# Altium PCB POL.PcbDoc
Units mm, origin at the board's own origin, x right, y up, seen from the top; angles counter-clockwise.
Board outline 54.86 x 9.4 mm, 2 copper layers (Top Layer, Bottom Layer), stack 0.266 mm thick; 32 components, 16 nets, 67 pads, 17 vias.
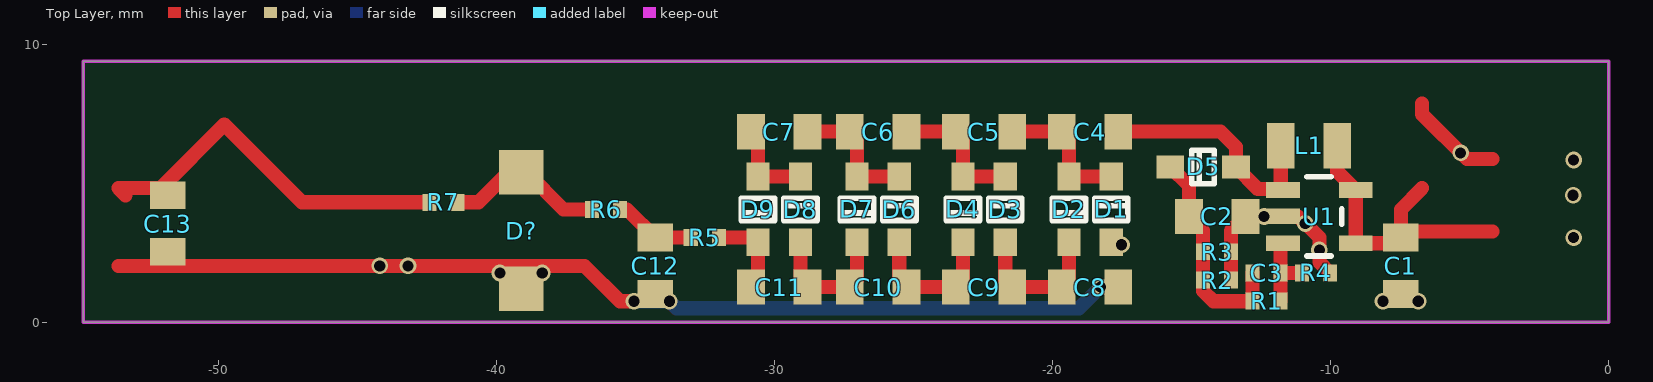
[diagram p0: Top Layer view]
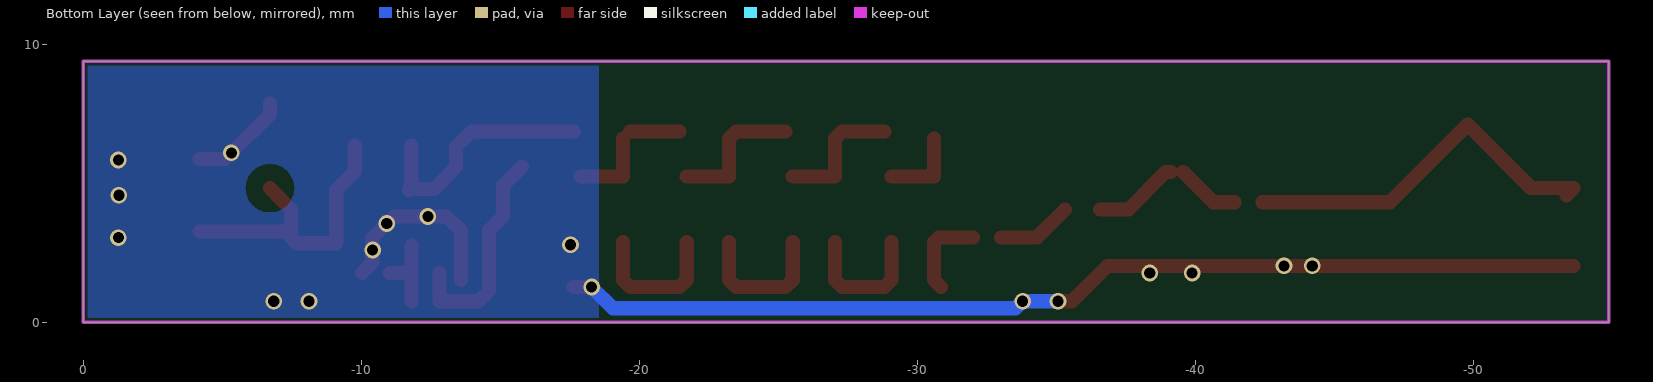
[diagram p1: Bottom Layer view, seen from below]

## Layer stack, top to bottom
Top Solder: solder mask 0.0102, Solder Resist, Dk 3.5
Top Layer: signal copper 0.0356
Dielectric1: core 0.195, FR-4, Dk 4.2
Bottom Layer: signal copper 0.0356
Bottom Solder: solder mask 0.0102, Solder Resist, Dk 3.5

## Board outline
-54.864,0 0,0 0,9.398 -54.864,9.398

## Design rules (kind name [scope] priority, off if disabled: settings)
Clearance Clearance_1 [InNetClass('50R') vs InPolygon] p1: gap=0.508 ignorepadtopadclearanceinfootprint=FALSE except(0: Arc-Hole Track-Hole SMDPad-Hole THPad-Hole Via-Hole Fill-Hole Poly-Hole Region-Hole Text-Hole)
Clearance [All] p2: gap=0.102 ignorepadtopadclearanceinfootprint=FALSE
DiffPairsRouting [All] p1: maxlimit=0.254 minlimit=0.152 mostfreqgap=0.152 toplayer_minwidth=0.152 toplayer_maxwidth=0.381 toplayer_prefwidth=0.152 bottomlayer_minwidth=0.152 bottomlayer_maxwidth=0.381 bottomlayer_prefwidth=0.152 maxuncoupledlength=12.7
FanoutControl Fanout_Default [All] p5: bgadir=Out bgaviamode=Closest fanoutstyle=Auto fanoutdirection=Alternating viagrid=0.025 // Fanout_Default (Default Rule)
MinimumSolderMaskSliver [All] p1 off: minsoldermaskwidth=0.254
PlaneClearance [All] p1: clearance=0.152
PlaneConnect [All] p1: planeconnectstyle=Direct reliefexpansion=0.508 reliefentries=4 reliefconductorwidth=0.254 reliefairgap=0.254
PolygonConnect [All] p1: connectstyle=Direct reliefconductorwidth=0.254 reliefentries=4 polygonreliefangle="90 Angle" airgapwidth=0.254
RoomDefinition POL [InComponentClass('POL')] p1 off: confinementstyle=ConfineIn formatcopy=TRUE lockcomponents=FALSE outline -54.628,-6.22 31.478,-6.22 31.478,-1.699 -54.628,-1.699
RoutingVias [All] p1: holewidth=0.2 width=0.45 viastyle="Through Hole" minholewidth=0.2 minwidth=0.45 maxholewidth=0.508 maxwidth=1.27
SilkToSilkClearance [All] p1 off: silktosilkclearance=0.254
SilkToSolderMaskClearance [IsPad] p1 off: minsilkscreentomaskgap=0.254 clearancetoexposedcopper=TRUE
SolderMaskExpansion [All] p1 off: expansion=0.076
Width Width_1 [InNet('3.3') or InNet('GND')] p1: maxlimit=5.08 minlimit=0.089 preferedwidth=0.089
Width [All] p2: maxlimit=2.54 minlimit=0.089 preferedwidth=0.089
23 further rules are at their usual default settings.

## Components (designator, comment, footprint, x,y, rotation, side; value= is the part's Value field where it differs from the comment)
C1 "2.2uF" 0805 -7.482,2.032 r90 top
C2 "2.2uF" 0805 -14.086,3.81 r180 top
C3 "470pf" 0402 -12.308,1.778 r180 top
C4 "2.2uF" 0805 -18.658,6.858 r180 top
C5 "2.2uF" 0805 -22.468,6.858 r180 top
C6 "2.2uF" 0805 -26.278,6.858 r180 top
C7 "2.2uF" 0805 -29.834,6.858 r180 top
C8 "2.2uF" 0805 -18.658,1.27 r180 top
C9 "2.2uF" 0805 -22.468,1.27 r180 top
C10 "2.2uF" 0805 -26.278,1.27 r180 top
C11 "2.2uF" 0805 -29.834,1.27 r180 top
C12 "2.2uF" 0805 -34.29,2.032 r90 top
C13 "2.2uF" 0805 -51.816,3.556 r90 top
D1 "Diode 1N4148" LC-SOD-323 -17.896,4.064 r270 top
D2 "Diode 1N4148" LC-SOD-323 -19.42,4.064 r90 top
D3 "Diode 1N4148" LC-SOD-323 -21.706,4.064 r270 top
D4 "Diode 1N4148" LC-SOD-323 -23.23,4.064 r90 top
D5 "Diode 1N4148" LC-SOD-323 -14.594,5.588 r0 top
D6 "Diode 1N4148" LC-SOD-323 -25.516,4.064 r270 top
D7 "Diode 1N4148" LC-SOD-323 -27.04,4.064 r90 top
D8 "Diode 1N4148" LC-SOD-323 -29.072,4.064 r270 top
D9 "Diode 1N4148" LC-SOD-323 -30.596,4.064 r90 top
D? "D Zener" SMA -39.116,3.302 r90 top
L1 "Inductor Iron Dot" 0806 -10.784,6.35 r180 top value=10uH
R1 "" 0402 -12.308,0.762 r180 top value=10k
R2 "" 0402 -14.086,1.524 r180 top value=10k
R3 "" 0402 -14.086,2.54 r180 top value=10k
R4 "" 0402 -10.53,1.778 r180 top value=10k
R5 "" 0402 -32.512,3.048 r0 top value=10k
R6 "" 0402 -36.068,4.064 r0 top value=10k
R7 "" 0402 -41.91,4.318 r0 top value=10k
U1 "LM27313XMF/NOPB" SOT23-5 -10.426,3.81 r270 top value=Value

## Footprints (in the part's own frame and the unit in brackets; to place one, negate y for a bottom-side part, rotate by r counter-clockwise, add the part's x,y. Pads: shape width x height; smd on the part's side, far side on the other; paste and mask are expansions set on the pad)
0402 [mil] "0402-RES"
  rect 20x24 smd: 1(-19.68,0) 2(20,0)
0805 [mm]
  rect 1x1.27 smd: 1(-1.016,0) 2(1.016,0)
  body extent -1.27,-0.76 1.27,0.76, height 0.8
0806 [mm]
  rect 1x1.65 smd: 1(-1.016,0) 2(1.016,0)
  body extent -1,-0.8 1,0.8, height 0.5
LC-SOD-323 [mm]
  rect 1x0.83 smd: 1(1.18,0) 2(-1.18,0)
  silkscreen extent -0.4,-0.6 0.4,0.6, body extent -1.35,-0.62 1.35,0.63, height 1.1
SMA [mm]
  rect 1.6x1.6 smd: 1(-2.1,0) 2(2.1,0)
  body extent -2.1,-1.3 2.1,1.3, height 2.3
SOT23-5 [mil] "SOT23-5"
  rect 22x48 smd: 1(-37.4,-51.19) 2(0,-51.19) 3(38,-51.19) 4(38,52) 5(-37.4,52)
  silkscreen extent -56,-17 56,32

## Part data
C1 C2 C3 C4 C5 C6 C7 C8 C9 C10 C11 C12 C13: library part CAP0402-CAP, "<b>Capacitor</b> / Standard 0603 ceramic capacitor, and 0.1\" leaded capacitor.", PARTNO=CC0402ZRY5V7BB104
D1 D2 D3 D4 D5 D6 D7 D8 D9: "High Conductance Fast Diode", Code_JEDEC=DO-204-AH, ComponentLink1Description="Manufacturer Link", ComponentLink1URL=http://www.fairchildsemi.com/, ComponentLink2Description=Datasheet, ComponentLink2URL=http://www.fairchildsemi.com/ds/1N%2F1N4148.pdf, DatasheetVersion=1997, LatestRevisionDate=17-Jul-2002, LatestRevisionNote="Re-released for DXP Platform.", PackageDescription="Diode, Axial; Body 3.8 x 1.9 mm (LxDia. max), Lead Dia. 0.53 mm (max)", PackageReference=DO-35, Published=8-Jun-2000, Publisher="Altium Limited"
D?: "Zener Diode", LatestRevisionDate=17-Jul-2002, LatestRevisionNote="Re-released for DXP Platform.", PackageDescription="Diode, Thru-Hole; 2 Leads; 0.7 in Pin Spacing", PackageReference=DIODE-0.7, Published=8-Jun-2000, Publisher="Altium Limited"
L1: "Magnetic-Core Inductor with Winding Polarity Marking", LatestRevisionDate=17-Jul-2002, LatestRevisionNote="Re-released for DXP Platform.", PackageDescription="Diode; 2 Leads", PackageReference=DIODE_SMC, Published=24-Mar-1999, Publisher="Altium Limited"
R1 R2 R3 R4 R5 R6 R7: library part Res2, "Resistor", LatestRevisionDate=17-Jul-2002, LatestRevisionNote="Re-released for DXP Platform.", PackageDescription="Axial Device, Thru-Hole; 2 Leads; 0.4 in Pin Spacing", PackageReference=AXIAL-0.4, Published=8-Jun-2000, Publisher="Altium Limited"
U1: "Imported", Manufacturer="Texas Instruments", CompType=IC, MountType=SMT, PackageReference=DBV0005A, PartNumber=LM27313XMF/NOPB, PIN_COUNT=5, RefDes=RefDes, RoHS=Y, Type=DEV

## Via types
v1: diameter 0.6, hole 0.4, Top Layer to Bottom Layer, 17 vias

## Nets (pads, with @x,y where several pads share a name; then routed paths per layer and width w, separated by ;. In a path a pad name is that pad's centre, name@x,y a point inside that pad or via, vN(x,y) a via of type N, cw(c..) or ccw(c..) an arc to the next point about the centre after c; other vN are vias at no path point)
5V: C1.2 L1.1 U1.4 U1.5 | length 11
  Top Layer w0.508: L1.1 -9.768,5.423 U1.5 U1.4 -7.685,2.845 C1.2 ; -6.72,4.826 -7.482,4.064 C1.2 ; -4.188,3.272 -7.258,3.272 C1.2
GND: C1.1 C2.1 C8.1 C12.1 C13.1 D1.1 D?.1 R2.1 R3.1 R4.1 U1.2 | length 43.8
  Top Layer w0.508: -53.594,2.032 -49.784,2.032 v1(-44.196,2.032) v1(-43.18,2.032) -36.83,2.032 -35.56,0.762 v1(-35.052,0.762) ; v1(-18.288,1.27) C8.1 ; R2.1 R3.1 -13.586,3.294 C2.1 U1.2 -11.176,3.81 -10.414,3.048 -10.414,2.162 R4.1
  Bottom Layer w0.508: v1(-35.052,0.762) v1(-33.782,0.762) -33.528,0.508 -19.05,0.508 v1(-18.288,1.27)
  other v1: -8.128,0.762 -6.858,0.762 -39.878,1.778 -38.354,1.778 -10.414,2.605 -17.526,2.794 -10.922,3.556 -12.398,3.81
NetC2_2: C2.2 C3.2 D5.2 R1.2 R2.2 R3.2 | length 7.9
  Top Layer w0.508: D5.2 -15.102,4.916 C2.2 -14.594,3.302 R3.2 R2.2 -14.594,1.132 -14.224,0.762 R1.2 C3.2
NetC3_1: C3.1 R1.1 R4.2 U1.3 | length 2.8
  Top Layer w0.508: R1.1 C3.1 ; U1.3@-11.808,2.763 C3.1 ; R4.2 C3.1
NetC4_2: C4.2 C5.1 D1.2 D2.1 | length 4.7
  Top Layer w0.508: C5.1 C4.2 ; C4.2@-19.42,6.604 D2.1 D1.2
NetC5_2: C5.2 C6.1 D3.2 D4.1 | length 5
  Top Layer w0.508: C6.1 C5.2 -23.23,6.604 D4.1 D3.2
NetC6_2: C6.2 C7.1 D6.2 D7.1 | length 4.8
  Top Layer w0.508: C7.1 C6.2 -27.04,6.604 D7.1 D6.2
NetC7_2: C7.2 D8.2 D9.1 | length 2.9
  Top Layer w0.508: C7.2@-30.596,6.604 D9.1 D8.2
NetC8_2: C8.2 C9.1 D2.2 D3.1 | length 5.2
  Top Layer w0.508: D3.1 -21.706,1.524 C9.1 C8.2 -19.42,1.524 D2.2
NetC9_2: C9.2 C10.1 D4.2 D6.1 | length 5.2
  Top Layer w0.508: D6.1 -25.516,1.524 C10.1 C9.2 -23.23,1.524 D4.2
NetC10_2: C10.2 C11.1 D7.2 D8.1 | length 5
  Top Layer w0.508: D8.1 -29.072,1.524 C11.1 C10.2 -27.04,1.524 D7.2
NetC11_2: C11.2 D9.2 R5.2 | length 3
  Top Layer w0.508: R5.2 D9.2@-30.76,3.048 ; C11.2 -30.596,1.524 D9.2
NetC12_2: C12.2 R5.1 R6.2 | length 2.7
  Top Layer w0.508: -35.306,4.064 C12.2 R5.1
NetC13_2: C13.2 R7.1 | length 13.6
  Top Layer w0.508: -53.34,4.572 -53.594,4.826 -52.07,4.826 -49.784,7.112 -46.99,4.318 -43.688,4.318 R7.1
NetD?_2: D?.2 R6.1 R7.2 | length 5.4
  Top Layer w0.508: R7.2 -40.64,4.318 D?.2@-39.556,5.402 ; D?.2 -38.922,5.402 -37.584,4.064 R6.1
SW: C4.1 D5.1 L1.2 U1.1 | length 8.7
  Top Layer w0.508: C4.1 -13.97,6.858 -13.414,6.302 D5.1 -12.627,4.801 -11.726,4.801 U1.1 ; U1.1@-11.8,4.834 L1.2
copper on no net: | length 3.6
  Top Layer w0.508: -6.72,7.874 -6.72,7.482 -5.11,5.872 -4.188,5.872
  other v1: -1.27,3.048 -1.288,4.572 -1.27,5.842 -5.334,6.096

## Polygon pours and split planes (outlines as drawn)
GND on Bottom Layer "GND_L02_P010" (solid, remove dead copper, pour order 10): -18.542,0 -18.542,9.398 0,9.398 0,0

## Keep-outs
Keep-Out Layer:
  the board outline again, w0.127